# Altium PCB radial_led_watch.PcbDoc
Units mm, origin at the board's own origin, x right, y up, seen from the top; angles counter-clockwise.
Board outline 52 x 45 mm, 4 copper layers (Top Layer, Internal Signal 1, Internal Signal 2, Bottom Layer), stack 0.603 mm thick; 52 components, 32 nets, 168 pads, 286 vias.
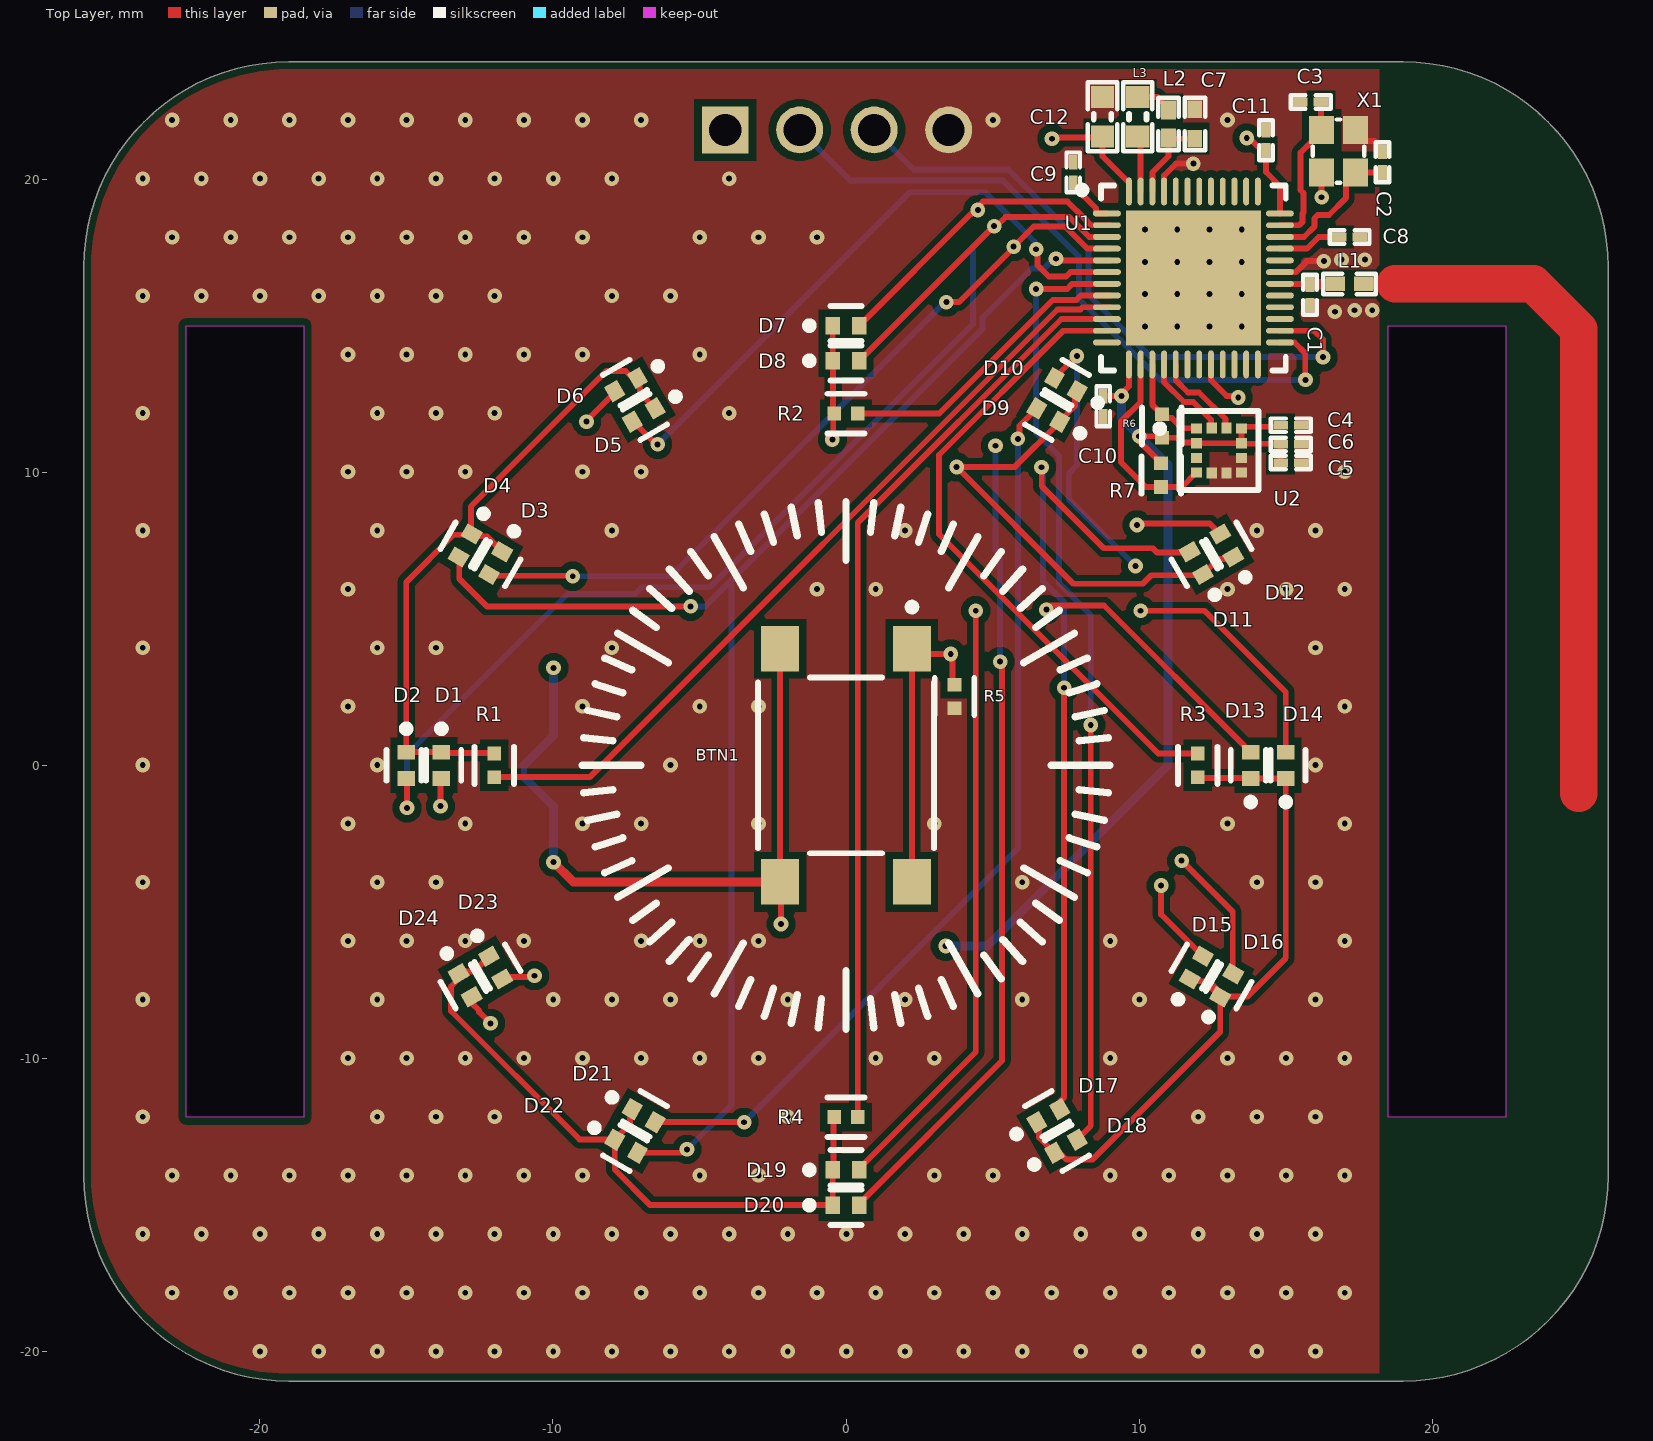
[diagram p0: Top Layer view]
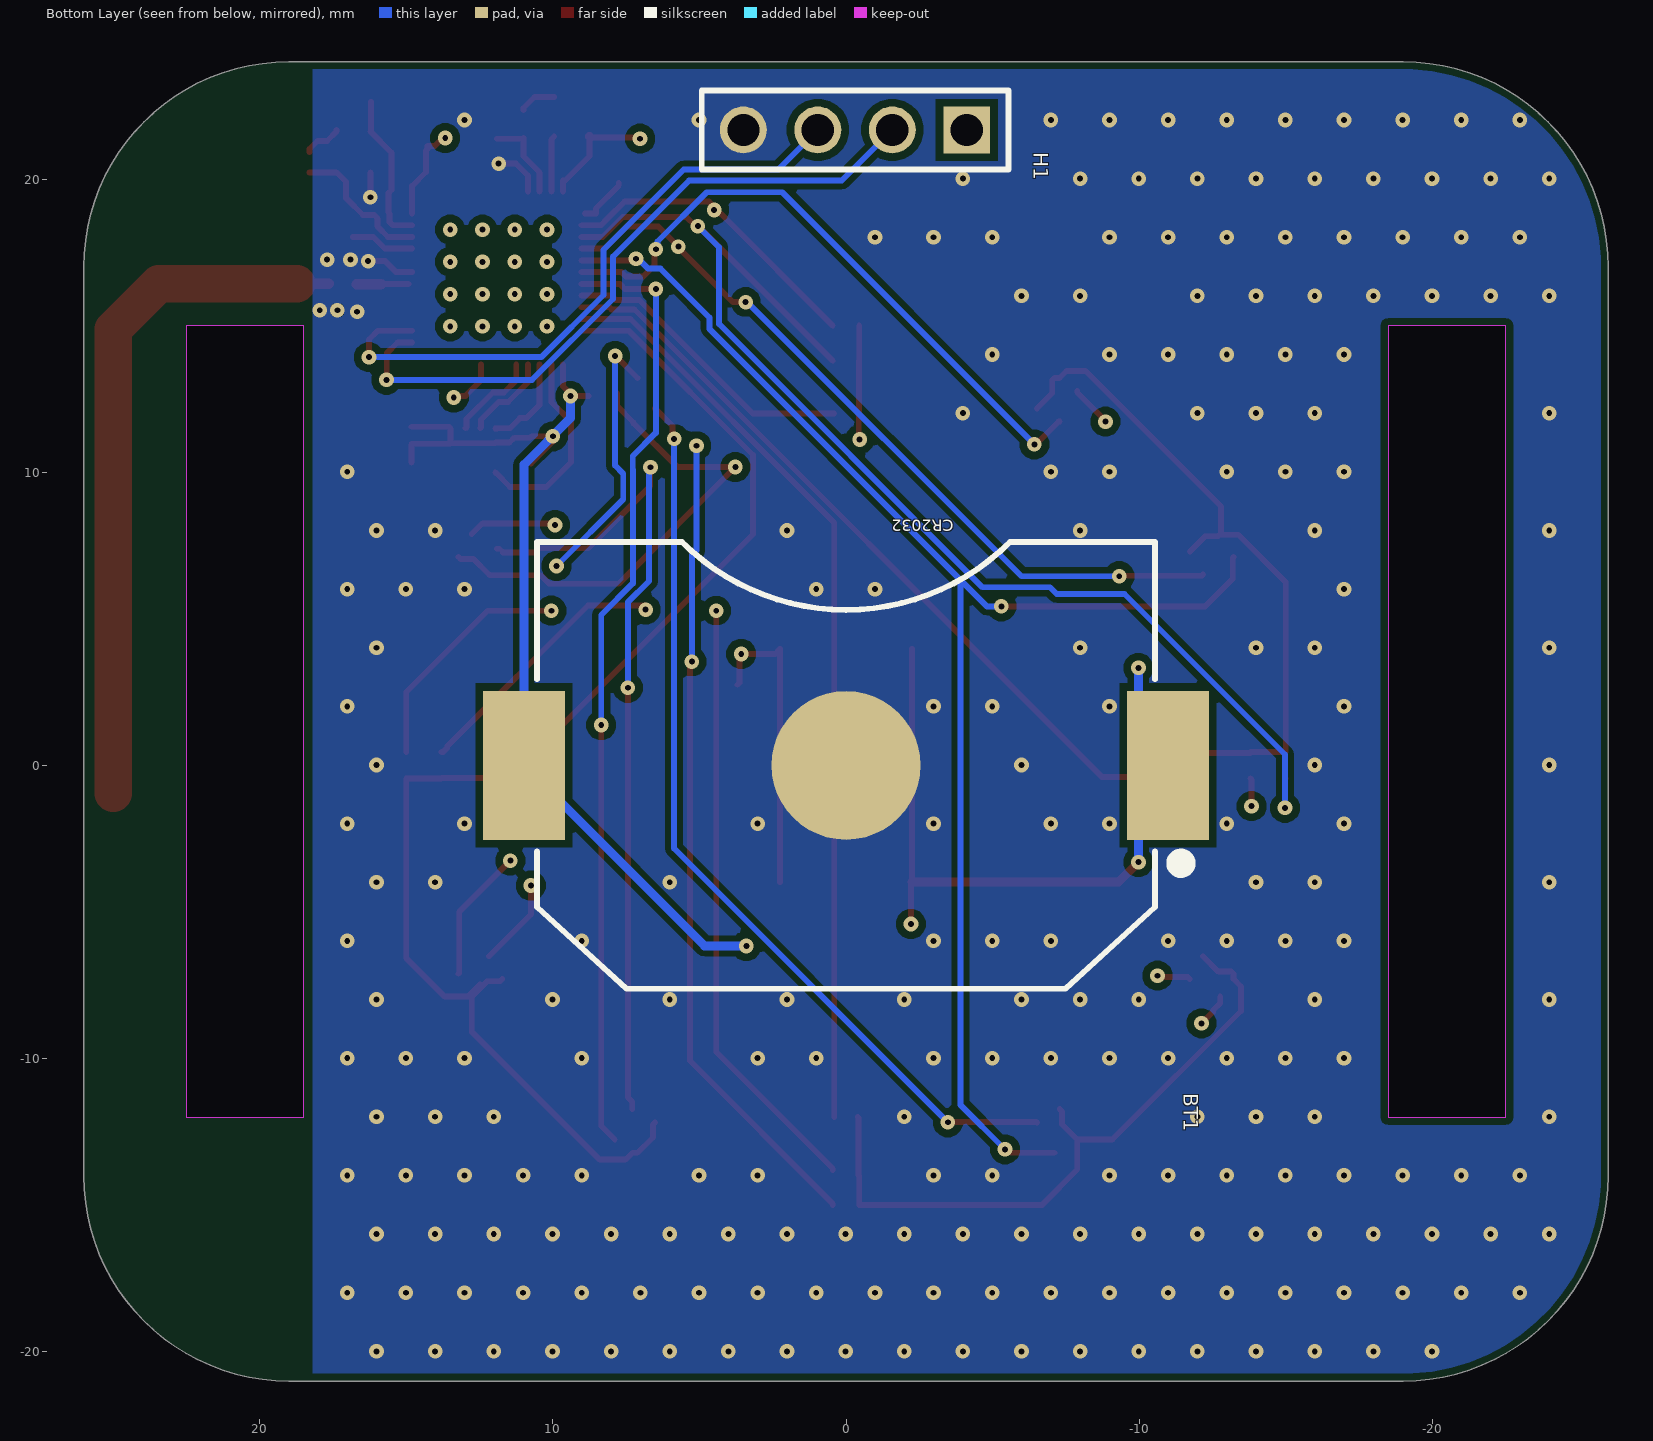
[diagram p1: Bottom Layer view, seen from below]
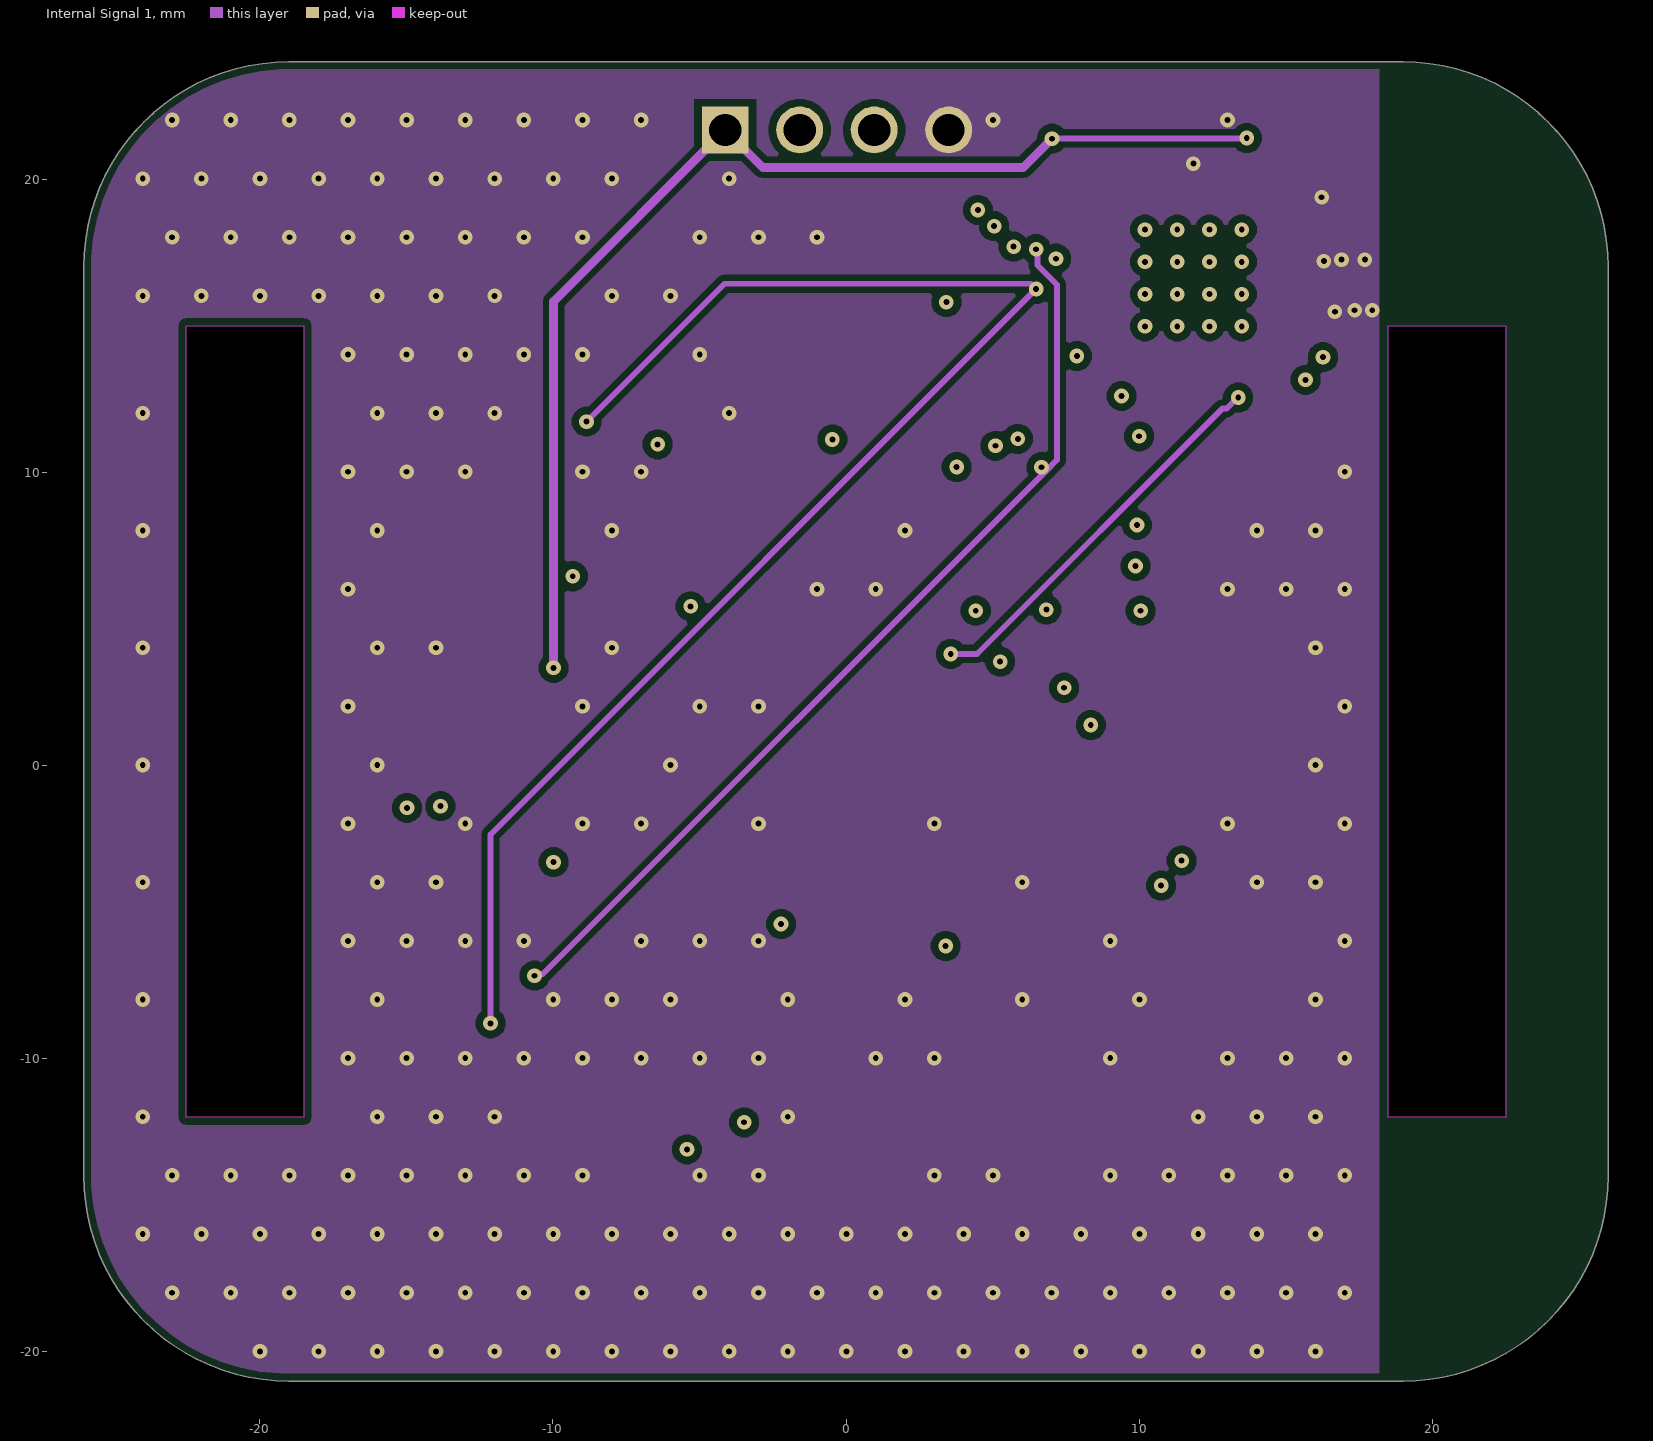
[diagram p2: Internal Signal 1]
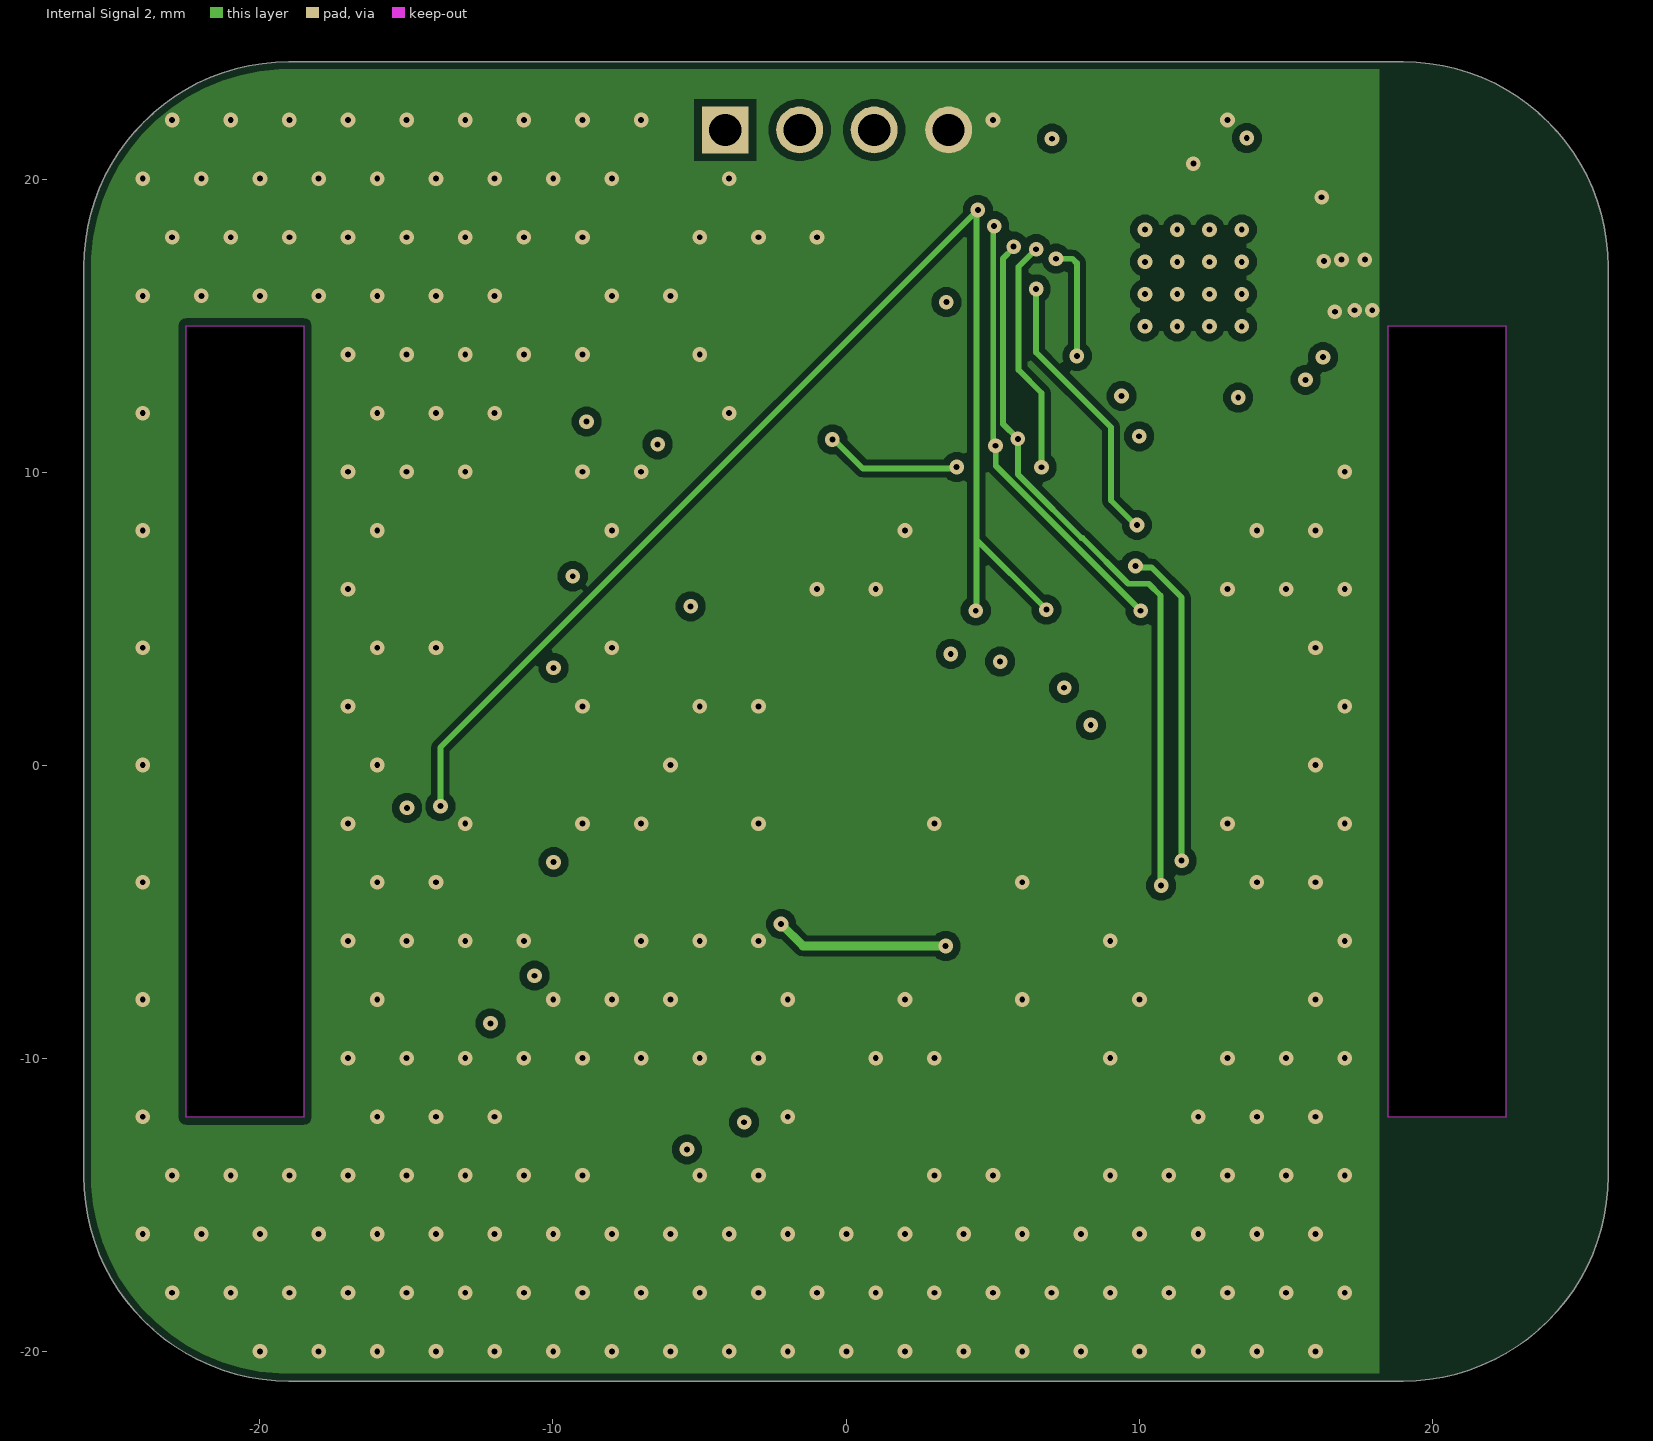
[diagram p3: Internal Signal 2]
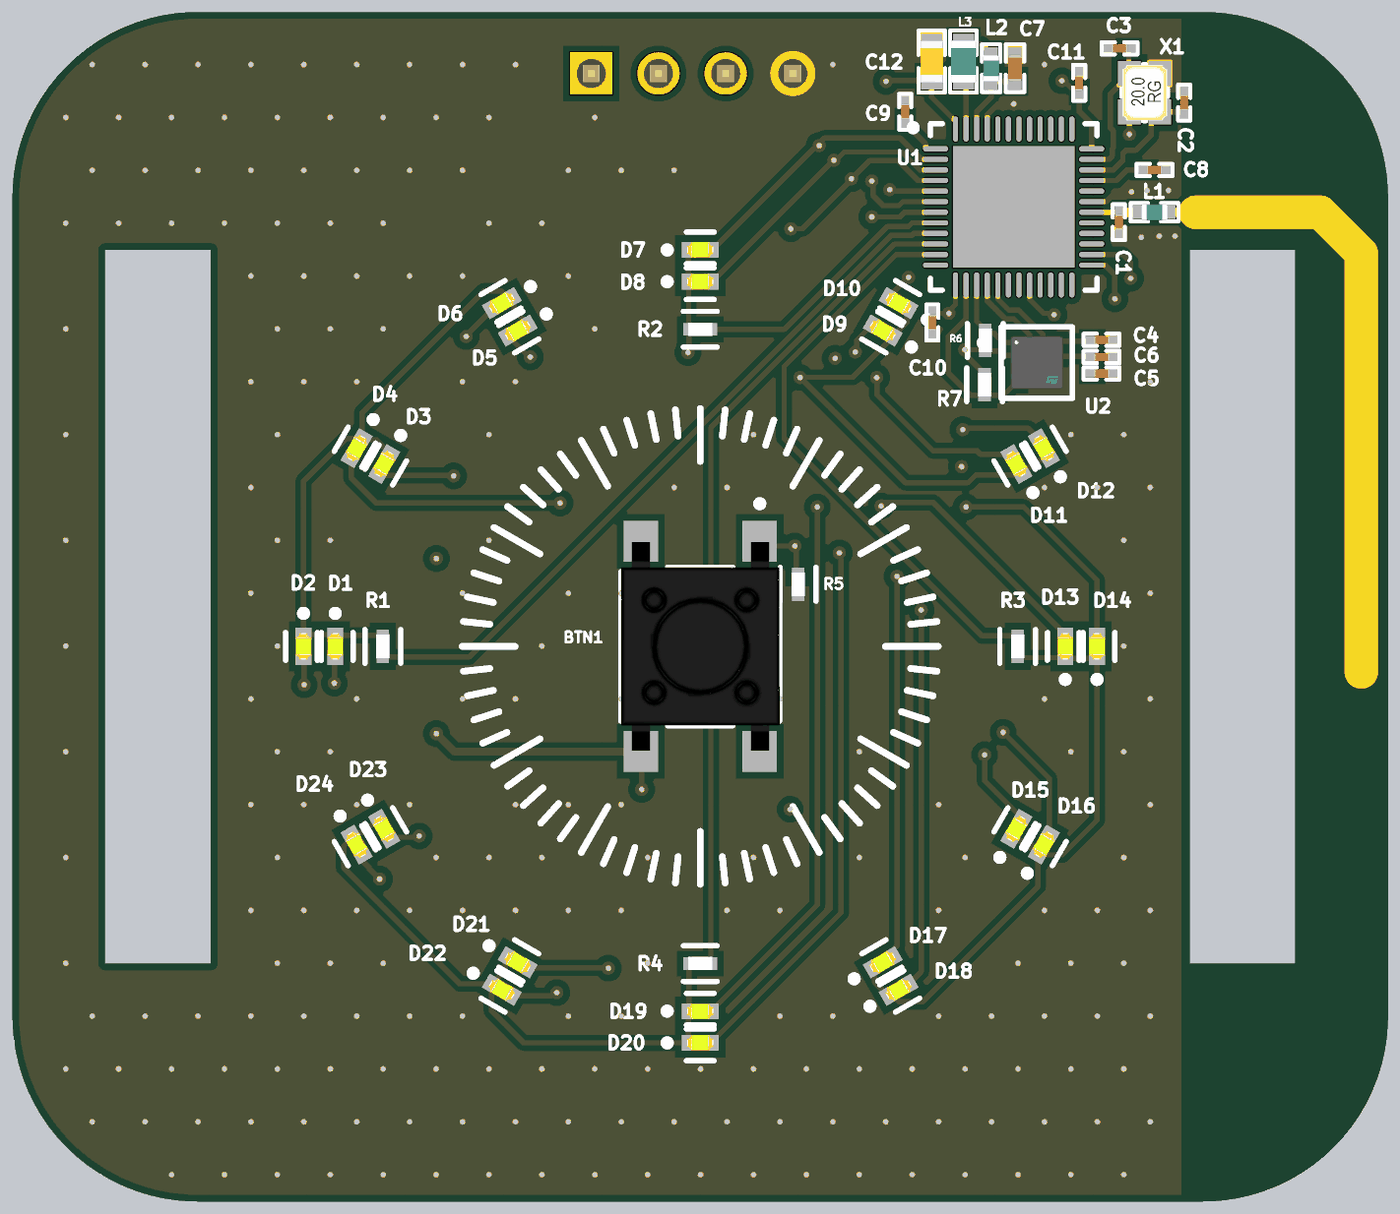
[diagram p4: 3D render of the assembled board from above, using the file's embedded part models]

## Layer stack, top to bottom
Top Solder: solder mask 0.0102, Solder Resist, Dk 3.5
Top Layer: signal copper 0.035
Dielectric 2: prepreg 0.0711, PP-006, Dk 4.1
Internal Signal 1: signal copper 0.0356
Dielectric 1: dielectric 0.32, FR-4, Dk 4.8
Internal Signal 2: signal copper 0.0356
Dielectric 3: prepreg 0.0711, PP-006, Dk 4.1
Bottom Layer: signal copper 0.035
Bottom Solder: solder mask 0.0102, Solder Resist, Dk 3.5

## Board outline
-26,-14 -26,17 cw(c-19,17) -19,24 19,24 cw(c19,17) 26,17 26,-14 cw(c19,-14) 19,-21 -19,-21 cw(c-19,-14)
cut-out: 18.5,15 22.5,15 22.5,-12 18.5,-12
cut-out: -22.5,15 -18.5,15 -18.5,-12 -22.5,-12

## Design rules (kind name [scope] priority, off if disabled: settings)
BoardOutlineClearance [All] p1: gap=0.254 ignorepadtopadclearanceinfootprint=FALSE except(0: Arc-SplitContinuation Track-SplitContinuation SMDPad-SplitContinuation THPad-SplitContinuation Via-SplitContinuation Fill-SplitContinuation Poly-SplitContinuation Region-SplitContinuation Text-SplitContinuation)
Clearance Clearance_1 [All] p1: gap=0.254 ignorepadtopadclearanceinfootprint=FALSE except(0: Arc-Hole Track-Hole SMDPad-Hole THPad-Hole Via-Hole Fill-Hole Poly-Hole Region-Hole Text-Hole; 0.127: Arc-Arc Arc-Track Track-Track SMDPad-SMDPad; 0.2: Arc-SMDPad Arc-Fill Arc-Poly Arc-Region Track-SMDPad Track-Fill Track-Poly Track-Region; 0.33: Arc-THPad Track-THPad; 0.5: THPad-THPad)
DiffPairsRouting [All] p1: maxlimit=0.254 minlimit=0.2 mostfreqgap=0.2 toplayer_minwidth=0.2 toplayer_maxwidth=0.381 toplayer_prefwidth=0.2 midlayer1_minwidth=0.2 midlayer1_maxwidth=0.381 midlayer1_prefwidth=0.2 midlayer2_minwidth=0.2 midlayer2_maxwidth=0.381 midlayer2_prefwidth=0.2 bottomlayer_minwidth=0.2 bottomlayer_maxwidth=0.381 bottomlayer_prefwidth=0.2 maxuncoupledlength=12.7
HoleSize [All] p1: absolutevalues=TRUE maxlimit=2.54 minlimit=0.2 maxpercent=80.000 minpercent=20.000
MatchedLengths [InDifferentialPairClass('X1-Class')] p1: tolerance=0.25 checknetsindiffpair=FALSE checkdiffpairvsdiffpair=TRUE checkxsignals=TRUE checkothers=TRUE
PlaneClearance [All] p1: clearance=0.2
PlaneConnect [All] p1: planeconnectstyle=Direct reliefexpansion=0.508 reliefentries=4 reliefconductorwidth=0.254 reliefairgap=0.254
PolygonConnect [All] p1: connectstyle=Direct reliefconductorwidth=0.254 reliefentries=4 polygonreliefangle="90 Angle" airgapwidth=0.254
RoutingVias [All] p1: holewidth=0.2 width=0.5 viastyle="Through Hole" minholewidth=0.2 minwidth=0.45 maxholewidth=0.711 maxwidth=1.27
SolderMaskExpansion [All] p1: expansion=0.05 istentingtop=FALSE
Width [All] p1: maxlimit=1.27 minlimit=0.127 preferedwidth=0.2 minimp=50.000000 maximp=50.000000 favimp=50.000000
26 further rules are at their usual default settings.

## Classes and differential pairs
differential pair class X1-Class: X1
component class U_LED_multiplexing: D1 D2 D3 D4 D5 D6 D7 D8 D9 D10 D11 D12 D13 D14 D15 D16 D17 D18 D19 D20 D21 D22 D23 D24 R1 R2 R3 R4
differential pair X1: +X1_P -X1_N

## Components (designator, comment, footprint, x,y, rotation, side; value= is the part's Value field where it differs from the comment)
BT1 "BK-912-TR" MPD-CN-DIN-3_V 0,0 r0 bottom locked
BTN1 "PTS645SM43SMTR92LFS" FP-PTS645SM43SMTR92LFS-MFG 0,0 r270 top
C1 "0.8pF" CAPC0603X03L 15.825,16.05 r270 top
C2 "12pF" CAPC0603X03L 18.3,20.575 r90 top
C3 "12pF" CAPC0603X03L 15.85,22.625 r180 top
C4 "100nF" CAPC0603X03L 15.175,11.6 r0 top value=TBD
C5 "10uF" CAPC0603X03L 15.175,10.95 r180 top
C6 "100nF" CAPC0603X03L 15.175,10.325 r180 top
C7 "1.0µF" CAPC1005X04L 11.9,21.875 r270 top
C8 "100pF" CAPC0603X03L 17.175,18.025 r180 top value=TBD
C9 "100nF" CAPC0603X03L 7.75,20.225 r90 top value=TBD
C10 "100nF" CAPC0603X03L 8.775,12.25 r270 top value=TBD
C11 "100nF" CAPC0603X03L 14.325,21.325 r90 top value=TBD
C12 "4.7µF" CAPC1608X06L 8.75,22.125 r270 top
D1 "" FP-SML-P11MTT86-MFG -13.8,0 r270 top
D2 "" FP-SML-P11MTT86-MFG -15,0 r270 top
D3 "" FP-SML-P11MTT86-MFG -11.951,6.9 r240 top
D4 "" FP-SML-P11MTT86-MFG -12.99,7.5 r240 top
D5 "" FP-SML-P11MTT86-MFG -6.9,11.951 r210 top
D6 "" FP-SML-P11MTT86-MFG -7.5,12.99 r210 top
D7 "" FP-SML-P11MTT86-MFG 0,15 r0 top
D8 "" FP-SML-P11MTT86-MFG 0,13.8 r0 top
D9 "" FP-SML-P11MTT86-MFG 6.9,11.951 r150 top
D10 "" FP-SML-P11MTT86-MFG 7.5,12.99 r150 top
D11 "" FP-SML-P11MTT86-MFG 11.951,6.9 r120 top
D12 "" FP-SML-P11MTT86-MFG 12.99,7.5 r120 top
D13 "" FP-SML-P11MTT86-MFG 13.8,0 r90 top
D14 "" FP-SML-P11MTT86-MFG 15,0 r90 top
D15 "" FP-SML-P11MTT86-MFG 11.951,-6.9 r60 top
D16 "" FP-SML-P11MTT86-MFG 12.99,-7.5 r60 top
D17 "" FP-SML-P11MTT86-MFG 6.9,-11.951 r30 top
D18 "" FP-SML-P11MTT86-MFG 7.5,-12.99 r30 top
D19 "" FP-SML-P11MTT86-MFG 0,-13.8 r0 top
D20 "" FP-SML-P11MTT86-MFG 0,-15 r0 top
D21 "" FP-SML-P11MTT86-MFG -6.9,-11.951 r330 top
D22 "" FP-SML-P11MTT86-MFG -7.5,-12.99 r330 top
D23 "" FP-SML-P11MTT86-MFG -11.951,-6.9 r300 top
D24 "" FP-SML-P11MTT86-MFG -12.99,-7.5 r300 top
H1 "61300411121" 61300411121 -0.31,21.675 r0 bottom
L1 "3.3nH" INDC1005X04L 17.175,16.425 r0 top
L2 "15nH" INDC1005X04L 11,21.875 r90 top
L3 "10µH" INDC1608X06L 9.95,22.125 r270 top
R1 "1k" FP-CRCW0402-e3-IPC_C -12,0 r90 top
R2 "1k" FP-CRCW0402-e3-IPC_C 0,12 r180 top
R3 "1k" FP-CRCW0402-e3-IPC_C 12,0 r270 top
R4 "1k" FP-CRCW0402-e3-IPC_C 0,-12 r180 top
R5 "10k" FP-CRCW0402-e3-IPC_C 3.7,2.35 r90 top
R6 "4.7k" FP-CRCW0402-e3-IPC_C 10.775,11.575 r90 top
R7 "4.7k" FP-CRCW0402-e3-IPC_C 10.75,9.9 r270 top
U1 "NRF52832-QFAA-R" NRSC-QF-48_M 11.85,16.625 r0 top
U2 "LIS2DH12TR" FP-LGA-12-8365767-MFG 12.725,10.738 r0 top
X1 "32MHz" BT-XTAL_2016 16.8,20.95 r90 top

## Footprints (in the part's own frame and the unit in brackets; to place one, negate y for a bottom-side part, rotate by r counter-clockwise, add the part's x,y. Pads: shape width x height; smd on the part's side, far side on the other; paste and mask are expansions set on the pad)
61300411121 [mm] "Pin Header, pitch 2.54 mm, THT, Vertical, single row, 4p"
  rect 1.6x1.6 hole 1.1: 1(-3.81,0)
  round 1.6 hole 1.1: 2(-1.27,0) 3(1.27,0) 4(3.81,0)
  silkscreen extent -5.23,-1.35 5.23,1.35, body extent -5.08,-1.27 5.08,1.27, height 8.57
BT-XTAL_2016 [mm]
  rect 0.95x0.85 smd: 1(-0.725,-0.575) 2(0.725,-0.575) 3(0.725,0.575) 4(-0.725,0.575)
  silkscreen extent -1.08,-0.88 1.08,0.88, body extent -1.05,-0.85 1.05,0.85, height 0.56
CAPC0603X03L [mm]
  rect 0.5x0.3 smd: 1(-0.35,0) 2(0.35,0)
  silkscreen extent -0.68,-0.23 0.68,0.23, body extent -0.3,-0.15 0.31,0.15, height 0.3
CAPC1005X04L [mm]
  rect 0.6x0.5 smd: 1(-0.5,0) 2(0.5,0)
  silkscreen extent -0.9,-0.35 0.9,0.35, body extent -0.51,-0.25 0.51,0.25, height 0.5
CAPC1608X06L [mm]
  rect 0.75x0.8 smd: 1(-0.675,0) 2(0.675,0)
  silkscreen extent -1.17,-0.5 1.17,0.5, body extent -0.8,-0.43 0.8,0.43, height 0.8
FP-CRCW0402-e3-IPC_C [mm]
  rect 0.468x0.472 smd paste+0 mask+0: 1(-0.402,0) 2(0.402,0)
  silkscreen extent -0.64,-0.67 0.64,0.67, body extent -0.74,-0.38 0.74,0.38, height 0.25
FP-LGA-12-8365767-MFG [mm]
  rect 0.375x0.35 smd paste-1000 mask+0: 1(-0.763,0.75) 2(-0.763,0.25) 3(-0.763,-0.25) 4(-0.763,-0.75) 7(0.763,-0.75) 8(0.763,-0.25) 9(0.763,0.25) 10(0.763,0.75)
  rect 0.35x0.375 smd paste-1000 mask+0: 5(-0.25,-0.763) 6(0.25,-0.763) 11(0.25,0.763) 12(-0.25,0.763)
  silkscreen extent -2.15,-1.35 1.35,1.35, body extent -1.58,-1.58 1.58,1.58, height 0.25
FP-PTS645SM43SMTR92LFS-MFG [mm]
  rect 1.55x1.3 smd paste+0 mask+0: 1(-3.975,2.25) 2(3.975,2.25) 3(-3.975,-2.25) 4(3.975,-2.25)
  silkscreen extent -5.52,-3 3,3, body extent -4.85,-3.1 4.85,3.1, height 0.25
FP-SML-P11MTT86-MFG [mm]
  rect 0.5x0.6 smd paste+0 mask+0: 1(-0.45,0) 2(0.45,0)
  silkscreen extent -1.37,-0.67 0.53,0.67, body extent -0.5,-0.3 0.5,0.3, height 0.25
INDC1005X04L [mm]
  rect 0.65x0.5 smd: 1(-0.475,0) 2(0.475,0)
  silkscreen extent -0.9,-0.35 0.9,0.35, body extent -0.5,-0.3 0.5,0.3, height 0.5
INDC1608X06L [mm]
  rect 0.75x0.8 smd: 1(-0.675,0) 2(0.675,0)
  silkscreen extent -1.17,-0.5 1.17,0.5, body extent -0.8,-0.48 0.8,0.48, height 0.8
MPD-CN-DIN-3_V [mm] "CN-DIN, 3-Leads, Body 21.08x15.24mm"
  rect 2.79x5.08 smd: 1(-10.985,0) 2(10.985,0)
  round 5.08 smd: 3(0,0)
  silkscreen extent -11.68,-7.62 10.54,7.62, body extent -10.54,-10 10.57,10, height 4.57
NRSC-QF-48_M [mm] "QFN, 48-Leads, Body 6.00x6.00mm, Pitch 0.40mm, Thermal Pad 4.60x4.60mm, IPC Low Density"
  oval 0.95x0.2 smd: 1(-2.95,2.2) 2(-2.95,1.8) 3(-2.95,1.4) 4(-2.95,1) 5(-2.95,0.6) 6(-2.95,0.2) 7(-2.95,-0.2) 8(-2.95,-0.6) 9(-2.95,-1) 10(-2.95,-1.4) 11(-2.95,-1.8) 12(-2.95,-2.2) 25(2.95,-2.2) 26(2.95,-1.8) 27(2.95,-1.4) 28(2.95,-1) 29(2.95,-0.6) 30(2.95,-0.2) 31(2.95,0.2) 32(2.95,0.6) 33(2.95,1) 34(2.95,1.4) 35(2.95,1.8) 36(2.95,2.2)
  oval 0.2x0.95 smd: 13(-2.2,-2.95) 14(-1.8,-2.95) 15(-1.4,-2.95) 16(-1,-2.95) 17(-0.6,-2.95) 18(-0.2,-2.95) 19(0.2,-2.95) 20(0.6,-2.95) 21(1,-2.95) 22(1.4,-2.95) 23(1.8,-2.95) 24(2.2,-2.95) 37(2.2,2.95) 38(1.8,2.95) 39(1.4,2.95) 40(1,2.95) 41(0.6,2.95) 42(0.2,2.95) 43(-0.2,2.95) 44(-0.6,2.95) 45(-1,2.95) 46(-1.4,2.95) 47(-1.8,2.95) 48(-2.2,2.95)
  rect 4.6x4.6 smd: 49(0,0)
  silkscreen extent -3.92,-3.15 3.15,3.15, body extent -3,-3 3,3, height 0.9

## Part data
BT1: library part CMP-0452-00001-3, "Coin Cell Holder, 21.08 x 15.24 mm SMD", Manufacturer="Memory Protection Devices", Battery Series=2032, Battery Type, Function="Coin Cell, Retainer", Category="Battery Products", ComponentLink1Description="Manufacturer URL", ComponentLink1URL=http://www.memoryprotectiondevices.com/, ComponentLink2Description=Datasheet, ComponentLink2URL=http://www.memoryprotectiondevices.com/datasheets/BK-912-datasheet.pdf, ComponentLink3Description="Package Specification", ComponentLink3URL=http://www.memoryprotectiondevices.com/datasheets/BK-912-datasheet.pdf, Family="Battery Holders, Clips, Contacts", Mounting Technology="Surface Mount", Number of Cells=1, PackageDescription="3-Pin, CN-DIN, Body 21.08x15.24mm", PackageReference=CN-DIN-3, PartNumber=BK-912-TR
BTN1: library part CMP-2000-05160-2, "SWITCH TACTILE SPST-NO 0.05A 12V", Case/Package=SMD/SMT, Color=Black, Contact Resistance=100mR, Current Rating=50mA, Max Operating Temperature=60°C, Max Voltage Rating (DC)=12V, Min Operating Temperature=-20°C, Operating Force=160gf, Package Quantity=1, Actuator Length=0.85mm, Actuator Material=Nylon, Actuator Type=Standard, Contact Material=Silver, Contact Plating=Silver, Depth=9mm, Illumination Type=Non-Illuminated, Lead Free="Lead Free", Length=6mm, Max Current Rating=50mA, Mechanical Life=100000Cycles, Mount="Surface Mount", Orientation=Straight, Packaging="Tape and Reel", REACH SVHC="No SVHC", Switch Function=Off-Mom, Termination="Gull Wing", Throw Configuration=SPST, Voltage Rating (DC)=12V
C1 C2 C3 C4 C5 C6 C8 C9 C10 C11: library part CAP_0201, "Capacitor, NP0, ±5%", Part Number=C0201-TBD, Artikkelnr Noca=N.A., Artikkelnr Simpro=N.A., Footprint Doc=0201, LatestRevisionDate=2014-11-13, Note="Chip Cap", Pin Count=2, Published=2014-11-13, Publisher="Nordic Semiconductor"
C7: library part CAP_0402, "Capacitor, X5R, ±5%", Part Number=C0402-1µ0, Artikkelnr Noca=20039235, Artikkelnr Simpro=N.A., Footprint Doc=0402, LatestRevisionDate=2009-11-23, Note=6.3V, Pin Count=2, Published=2009-05-08, Publisher="Nordic Semiconductor"
C12: library part CAP_0603, "Capacitor, X5R, ±10%", Part Number=C0603-4µ7, Artikkelnr Noca=20069060, Artikkelnr Simpro=N.A., Footprint Doc=0603, LatestRevisionDate=2009-11-23, Note=6.3V, Pin Count=2, Published=2009-05-08, Publisher="Nordic Semiconductor"
D1 D2 D3 D4 D5 D6 D7 D8 D9 D10 D11 D12 D13 D14 D15 D16 D17 D18 D19 D20 D21 D22 D23 D24: library part CMP-2000-07126-2, "LED YELLOW/GREEN CLEAR 1006 SMD", Case Code (Imperial)=0402, Case Code (Metric)=1005, Color=Green, Forward Current=20mA, Forward Voltage=1.9V, Lens Color=Colorless, Max Operating Temperature=85°C, Min Operating Temperature=-40°C, Package Quantity=1, Power Rating=54mW, Test Current=1mA, Case/Package=0402, Dominant Wavelength=569nm, Height=0.25mm, Illumination Color=Green, Lead Free="Lead Free", Length=1mm, Lens Style=Diffused, Lens Transparency=Clear, Luminous Intensity=2.1mcd, Mount="Surface Mount", Number of LEDs=1, Number of Pins=2, Packaging="Tape and Reel", Radiation Hardening=No, REACH SVHC="No SVHC", RoHS Compliant=Yes, Series=PicoLED™, Viewing Angle=150°, Wavelength=569nm, Width=0.6mm
H1: library part CMP-1502-01064-1, "THT Vertical Pin Header WR-PHD, Pitch 2.54 mm, Single Row, 4 pins", Contact Resistance=20mOhm, Manufacturer="Wurth Elektronik", Operating Temperature=-40to105degC, Rated Current=3A, Withstanding Voltage=500VAC, Working Voltage=250VAC, Datasheet URL=https://katalog.we-online.de/em/datasheet/6130xx11121.pdf, Gender=Male, Manufacturer URL=http://www.we-online.de, Mounting Technology=THT, Orientation=Vertical, Package Reference=61300411121, Packaging=Bag, Part Number=61300411121, Pin Number=4, Pitch=2.54mm, Publisher=WurthElektronik, Row Number=Single
L1 L2: library part IND_0402, "High frequency chip inductor ±10%", 2nd source part number=658-1328, Manufacturer="Taiyo Yuden", Manufacturer Part Number=HK100515NJ-T, Part Number=L0402-15n, Supplier part number=587-1521-1-ND, 2nd source Supplier=Farnell, Artikkelnr Noca=33029323, Artikkelnr Simpro=N.A., Datasheet=http://www.yuden.co.jp/productdata/catalog/en/mlci04_e.pdf, Footprint Doc=0402, LatestRevisionDate=2012-09-19, Note="High frequency chip inductor ±10%", Pin Count=2, Published=2010-07-12, Publisher="Nordic Semiconductor", Supplier=Digi-Key
L3: library part IND_0603, "Chip inductor, IDC,min = 50 mA, ±20%", 2nd source part number=178-6105, Manufacturer="Taiyo Yuden", Manufacturer Part Number=LBMF1608T100K, Part Number=L0603-10µ, Supplier part number=587-1714-1-ND, 2nd source Supplier=Farnell, Artikkelnr Noca=33029314, Artikkelnr Simpro=N.A., Datasheet=http://www.yuden.co.jp/ut/product/pdf/elb2_e.pdf, Footprint Doc=0603, LatestRevisionDate=2012-09-19, Note="LBMF1608T100K 10µH 80mA 0603", Pin Count=2, Published=2010-02-24, Publisher="Nordic Semiconductor", Supplier=Digi-Key
R1 R2 R3 R4 R5 R6 R7: library part CMP-2002-08122-2, "RES Thick Film, 0Ω, 0.063W, 0402", Case Code (Imperial)=0402, Case Code (Metric)=1005, Max Operating Temperature=155°C, Max Power Dissipation=63mW, Min Operating Temperature=-55°C, Package Quantity=1, Resistance=0mR, Temperature Coefficient=100ppm/°C, Tolerance=5%, Voltage Rating=50V, Case/Package=0402, Composition="Thick Film", Contact Plating=Tin, Depth=0.5mm, Features="Automotive AEC-Q200", Height=0.35mm, Lead Free="Lead Free", Length=1mm, Military Standard=Not, Mount="Surface Mount", Number of Terminations=2, Packaging="Tape and Reel", Power Rating=63mW, Radiation Hardening=No, Termination=SMD/SMT, Voltage Rating (DC)=50V, Weight=2.3E-05oz, Width=0.5mm
U1: library part CMP-2100-03661-1, "Multiprotocol Bluetooth Smart, ANT/ANT+ and Proprietary System-on-Chip, 2.4 GHz, 256 KB FLASH, 1.7 to 3.6 V, -40 to 85 degC, 48-Pin QFN, RoHS, Tape and Reel", Frequency=2.4GHz, Manufacturer="Nordic Semiconductor", Max Operating Temperature=85degC, Min Operating Temperature=-40degC, Package Description="48-Pin Quad Flat No-lead Package, Body 6 x 6 mm, Pitch 0.4 mm, Thermal Pad 4.6 x 4.6 mm", Package Reference=QF-48, Datasheet URL=http://infocenter.nordicsemi.com/pdf/nRF52832_PS_v1.0.pdf, Datasheet Version="Rev. 1.0, 02/2016", Lead Free=LeadFree, Manufacturer URL=http://www.nordicsemi.com/eng/Products/, Max Frequency=2.4GHz, Mount=SurfaceMount, Packaging=TapeandReel, RoHSCompliant=true
U2: library part CMP-2000-05369-2, "ACCEL 2-16G I2C/SPI 12LGA", Case/Package=LGA, Max Operating Temperature=85°C, Max Supply Voltage=3.6V, Min Operating Temperature=-40°C, Min Supply Voltage=1.71V, Axis="X, Y, Z", Bandwidth=672Hz, Contact Plating=Gold, Height=1mm, Interface=I2C, Lead Free="Lead Free", Length=2.15mm, Mount="Surface Mount", Number of Pins=12, Output Type=SPI, Packaging="Cut Tape", Radiation Hardening=No, REACH SVHC="No SVHC", Width=2.15mm
X1: library part XTAL_SMD2016, "XTAL SMD 2016, 32MHz, Cl=8pF, Total Tol: ±40ppm", Manufacturer="Epson Toyocom", Manufacturer Part Number=Q22FA12800025, Part Number=XTAL_SMD2016_32MHz_8pF_Epson, Supplier part number=171-2806, Artikkelnr Noca=N.A., Artikkelnr Simpro=N.A., Datasheet=http://www.epsondevice.com/docs/qd/en/DownloadServlet?id=ID000449, Footprint Doc=XTAL_2016, LatestRevisionDate=2014-11-27, Note="XTAL SMD 32.000MHz", Pin Count=4, Published=2012-03-09, Publisher="Nordic Semiconductor", Supplier=Farnell

## Via types
v1: diameter 0.5, hole 0.2, Top Layer to Bottom Layer, tented both sides, 270 vias
v2: diameter 0.5, hole 0.2, Top Layer to Bottom Layer, 16 vias

## Nets (pads, with @x,y where several pads share a name; then routed paths per layer and width w, separated by ;. In a path a pad name is that pad's centre, name@x,y a point inside that pad or via, vN(x,y) a via of type N, cw(c..) or ccw(c..) an arc to the next point about the centre after c; other vN are vias at no path point)
Antenna:  | length 23.8
  Top Layer w0.2: 18.731,16.425 18.743,16.437
  Top Layer w0.367: 17.65,16.425 18.731,16.425
  Top Layer w1.27: 18.731,16.425 23.444,16.425 24.991,14.878 24.991,-0.964
DEC4: C7.2 L2.1 U1.46 | length 3
  Top Layer w0.2: U1.46 10.45,20.225 11,20.775 L2.1 11.025,21.375 C7.2
GND: BT1.3 C1.2 C2.2 C3.2 C4.2 C5.1 C6.1 C7.1 C8.1 C9.2 C10.2 C11.2 C12.1 H1.4 R5.1 U1.31 U1.45 U2.5 U2.6 U2.7 U2.8 X1.2 X1.4 | length 5.5
  Top Layer w0.2: U1.45 10.85,20.116 11.259,20.525 v1(11.85,20.525) ; U1.31 15.341,16.825 15.716,17.2 v1(16.3,17.2) ; v1(16.225,19.376) X1.4 ; X1.2 17.375,21.625 17.7,21.3 18.025,21.3 18.3,21.025 C2.2
  other v1: -19.987,-19.987 -17.987,-19.987 -15.987,-19.987 -13.987,-19.987 -11.987,-19.987 -9.987,-19.987 -7.987,-19.987 -5.987,-19.987 -3.987,-19.987 -1.987,-19.987 0.013,-19.987 2.013,-19.987 4.013,-19.987 6.013,-19.987 8.013,-19.987 10.013,-19.987 12.013,-19.987 14.013,-19.987 16.013,-19.987 -22.987,-17.987 -20.987,-17.987 -18.987,-17.987 -16.987,-17.987 -14.987,-17.987 -12.987,-17.987 -10.987,-17.987 -8.987,-17.987 -6.987,-17.987 -4.987,-17.987 -2.987,-17.987 -0.987,-17.987 1.013,-17.987 3.013,-17.987 5.013,-17.987 7.013,-17.987 9.013,-17.987 11.013,-17.987 13.013,-17.987 15.013,-17.987 17.013,-17.987 -23.987,-15.987 -21.987,-15.987 -19.987,-15.987 -17.987,-15.987 -15.987,-15.987 -13.987,-15.987 -11.987,-15.987 -9.987,-15.987 -7.987,-15.987 -5.987,-15.987 -3.987,-15.987 -1.987,-15.987 0.013,-15.987 2.013,-15.987 4.013,-15.987 6.013,-15.987 8.013,-15.987 10.013,-15.987 12.013,-15.987 14.013,-15.987 16.013,-15.987 -22.987,-13.987 -20.987,-13.987 -18.987,-13.987 -16.987,-13.987 -14.987,-13.987 -12.987,-13.987 -10.987,-13.987 -8.987,-13.987 -4.987,-13.987 -2.987,-13.987 3.013,-13.987 5.013,-13.987 9.013,-13.987 11.013,-13.987 13.013,-13.987 15.013,-13.987 17.013,-13.987 -23.987,-11.987 -15.987,-11.987 -13.987,-11.987 -11.987,-11.987 -1.987,-11.987 12.013,-11.987 14.013,-11.987 16.013,-11.987 -16.987,-9.987 -14.987,-9.987 -12.987,-9.987 -10.987,-9.987 -8.987,-9.987 -6.987,-9.987 -4.987,-9.987 -2.987,-9.987 1.013,-9.987 3.013,-9.987 9.013,-9.987 13.013,-9.987 15.013,-9.987 17.013,-9.987 -23.987,-7.987 -15.987,-7.987 -9.987,-7.987 -7.987,-7.987 -5.987,-7.987 -1.987,-7.987 2.013,-7.987 6.013,-7.987 10.013,-7.987 16.013,-7.987 -16.987,-5.987 -14.987,-5.987 -12.987,-5.987 -10.987,-5.987 -6.987,-5.987 -4.987,-5.987 -2.987,-5.987 9.013,-5.987 17.013,-5.987 -23.987,-3.987 -15.987,-3.987 -13.987,-3.987 6.013,-3.987 14.013,-3.987 16.013,-3.987 -16.987,-1.987 -12.987,-1.987 -8.987,-1.987 -6.987,-1.987 -2.987,-1.987 3.013,-1.987 13.013,-1.987 17.013,-1.987 -23.987,0.013 -15.987,0.013 -5.987,0.013 16.013,0.013 -16.987,2.013 -8.987,2.013 -4.987,2.013 -2.987,2.013 17.013,2.013 -23.987,4.013 -15.987,4.013 -13.987,4.013 -7.987,4.013 16.013,4.013 -16.987,6.013 -0.987,6.013 1.013,6.013 13.013,6.013 15.013,6.013 17.013,6.013 -23.987,8.013 -15.987,8.013 -7.987,8.013 2.013,8.013 14.013,8.013 16.013,8.013 -16.987,10.013 -14.987,10.013 -12.987,10.013 -8.987,10.013 -6.987,10.013 17.013,10.013 -23.987,12.013 -15.987,12.013 -13.987,12.013 -11.987,12.013 -3.987,12.013 -16.987,14.013 -14.987,14.013 -12.987,14.013 -10.987,14.013 -8.987,14.013 -4.987,14.013 16.675,15.475 17.35,15.525 17.95,15.525 -23.987,16.013 -21.987,16.013 -19.987,16.013 -17.987,16.013 -15.987,16.013 -13.987,16.013 -11.987,16.013 -7.987,16.013 -5.987,16.013 16.9,17.25 17.7,17.25 -22.987,18.013 -20.987,18.013 -18.987,18.013 -16.987,18.013 -14.987,18.013 -12.987,18.013 -10.987,18.013 -8.987,18.013 -4.987,18.013 -2.987,18.013 -0.987,18.013 -23.987,20.013 -21.987,20.013 -19.987,20.013 -17.987,20.013 -15.987,20.013 -13.987,20.013 -11.987,20.013 -9.987,20.013 -7.987,20.013 -3.987,20.013 -22.987,22.013 -20.987,22.013 -18.987,22.013 -16.987,22.013 -14.987,22.013 -12.987,22.013 -10.987,22.013 -8.987,22.013 -6.987,22.013 5.013,22.013 13.013,22.013
"INT 1": U1.16 U2.12 | length 3
  Top Layer w0.2: U1.16 10.85,13.072 11.529,12.393 11.844,12.393 12.45,11.787 12.45,11.525 U2.12
"INT 2": U1.17 U2.11 | length 3.1
  Top Layer w0.2: U1.17 11.25,13.134 11.664,12.72 12.042,12.72 12.95,11.812 12.95,11.525 U2.11
NetD1_1: D1.1 D2.1 D3.1 D4.1 D5.1 D6.1 R1.2 | length 23
  Top Layer w0.2: R1.2 -12.024,0.426 -13.776,0.426 D1.1 D2.1 -15,6.251 -13.386,7.865 -12.79,7.865 D4.1 ; D3.1 -12.251,7.815 -12.69,7.815 D4.1 ; D5.1 -7.035,12.701 -7.035,13.14 D6.1 -7.283,13.215 -7.518,13.45 -8.175,13.45 -12.79,8.835 -12.79,7.915 D4.1
NetD7_1: D7.1 D8.1 D9.1 D10.1 D11.1 D12.1 R2.2 | length 25.5
  Top Layer w0.2: v1(-0.465,11.115) -0.433,11.146 -0.433,11.969 R2.2 -0.438,12.035 -0.438,13.787 D8.1 D7.1 ; D10.1 7.815,12.69 7.815,12.263 7.245,11.694 7.245,11.666 5.761,10.182 3.782,10.182 v1(3.775,10.175) 7.754,6.196 10.125,6.196 10.414,6.485 12.151,6.485 D11.1 12.701,7.035 13.14,7.035 D12.1
  Internal Signal 2 w0.2: v1(-0.465,11.115) -0.415,11.115 0.575,10.125 3.725,10.125 v1(3.775,10.175)
NetL1_1: C1.1 L1.1 U1.30 | length 1.8
  Top Layer w0.2: U1.30@14.925,16.425 C1.1@15.85,16.425 ; C1.1@15.85,16.4 C1.1@15.862,16.412 ; L1.1@16.687,16.412 L1.1
  Top Layer w0.367: C1.1@15.862,16.412 L1.1@16.687,16.412
NetC8_2: C8.2 U1.33 | length 2.2
  Top Layer w0.2: U1.33 15.725,17.625 16.125,18.025 C8.2
NetC9_1: C9.1 U1.1 | length 1.7
  Top Layer w0.2: C9.1 7.75,19.775 8.525,19 8.525,18.825 U1.1
NetD13_1: D13.1 D14.1 D15.1 D16.1 D17.1 D18.1 R3.2 | length 23.9
  Top Layer w0.2: D17.1 6.585,-12.251 6.585,-12.69 D18.1 7.283,-13.215 7.518,-13.45 8.4,-13.45 12.765,-9.085 D16.1 ; D15.1 11.801,-7.365 12.24,-7.365 D16.1 ; R3.2 12.024,-0.426 13.776,-0.426 D13.1 D14.1 15,-6.575 13.685,-7.89 D16.1@12.912,-7.89 ; 12.487,-7.465 D16.1@12.912,-7.89 ; D16.1 D16.1@12.912,-7.89
NetD19_1: D19.1 D20.1 D21.1 D22.1 D23.1 D24.1 R4.2 | length 23.3
  Top Layer w0.2: D23.1 -12.701,-7.035 -13.14,-7.035 D24.1 -13.215,-7.283 -13.475,-7.543 -13.475,-8.376 -9.086,-12.765 D22.1 ; D21.1 -7.365,-11.801 -7.365,-12.24 D22.1 ; R4.2 -0.426,-12.024 -0.426,-13.976 -0.45,-14 D20.1 -6.675,-15 -7.89,-13.785 -7.89,-12.975 D22.1
NetL2_2: L2.2 L3.1 | length 1.3
  Top Layer w0.2: L3.1 10.625,22.8 11,22.425 L2.2
NetL3_2: L3.2 U1.47 | length 1.9
  Top Layer w0.2: L3.2 10.05,21.35 U1.47
P0.17: BTN1.1 BTN1.2 R5.2 U1.20 | length 25.6
  Top Layer w0.2: BTN1.2 BTN1.1 2.425,3.8 v1(3.575,3.8) 3.632,3.743 3.632,2.82 R5.2 ; U1.20 12.45,13.134 12.981,12.603 13.321,12.603 v1(13.378,12.546)
  Internal Signal 1 w0.2: v1(3.575,3.8) 4.469,3.8 12.837,12.168 12.978,12.168 13.356,12.546 v1(13.378,12.546)
SCL: R6.2 U1.15 U2.1 | length 3.2
  Top Layer w0.2: U1.15 10.45,12.3 10.773,11.977 R6.2 10.909,11.843 11.119,11.843 11.463,11.5 11.875,11.5 11.887,11.488 U2.1
SDA: R7.2 U1.14 U2.4 | length 6.7
  Top Layer w0.2: U1.14 10.05,12.396 9.375,11.721 9.375,10.35 10.227,9.498 11.46,9.498 11.95,9.988 U2.4
"SINK 1": R1.1 U1.9 | length 27.7
  Top Layer w0.2: R1.1 -8.74,-0.402 7.215,15.552 8,15.552 8.073,15.625 U1.9@9.025,15.625
"SINK 2": R2.1 U1.8 | length 10.3
  Top Layer w0.2: R2.1 3.18,12 7.059,15.879 7.864,15.879 8.01,16.025 U1.8@9.025,16.025
"SINK 3": R3.1 U1.11 | length 22.2
  Top Layer w0.2: U1.11@9.025,14.825 7.412,14.825 3.171,10.584 3.171,7.883 10.652,0.402 R3.1
"SINK 4": R4.1 U1.10 | length 31.8
  Top Layer w0.2: R4.1 0.402,8.277 7.35,15.225 U1.10@9.025,15.225
"SRC 1": D1.2 D7.2 D13.2 D19.2 U1.2 | length 86.6
  Top Layer w0.2: v1(-13.833,-1.391) -13.833,-0.483 D1.2 ; D19.2 0.45,-13.75 4.425,-9.775 v1(4.425,5.275) ; D7.2 4.258,18.808 4.279,18.808 4.417,18.946 v1(4.498,18.946) ; v1@4.447,18.997 4.679,19.229 7.555,19.229 8.125,18.659 8.359,18.425 U1.2 U1.2@9.025,18.425 ; v1(6.836,5.314) 6.836,5.45 8.8,5.45 13.6,0.65 13.6,0.6 13.75,0.45 D13.2
  Internal Signal 2 w0.2: v1(-13.833,-1.391) -13.833,0.615 v1(4.498,18.946) ; v1(4.425,5.275) 4.447,5.297 4.447,7.703 ; v1@4.447,18.946 4.447,7.703 ; v1(6.836,5.314) 4.447,7.703
"SRC 2": D2.2 D8.2 D14.2 D20.2 U1.3 | length 94.1
  Top Layer w0.2: D2.2 -14.975,-0.475 v1(-14.975,-1.45) ; D20.2 0.45,-14.95 5.323,-10.077 5.323,3.272 5.316,3.28 5.316,3.482 v1(5.258,3.54) ; D8.2 5.043,18.393 v1(5.051,18.393) ; v1@5.047,18.397 5.136,18.397 5.445,18.706 7.616,18.706 8.297,18.025 U1.3@9.025,18.025 ; v1(10.05,5.275) 12.225,5.275 15,2.5 D14.2
  Internal Signal 2 w0.2: v1@5.023,10.9 5.023,18.365 v1(5.051,18.393) ; v1(5.1,10.9) 5.107,10.893 5.107,10.219 v1(10.05,5.275)
  Bottom Layer w0.2: v1(-14.975,-1.45) -14.975,0.369 -9.498,5.846 -7.188,5.846 -6.959,6.075 -4.65,6.075 4.334,15.059 4.334,17.676 v1(5.051,18.393) ; v1(5.1,10.9) 5.1,7.323 5.249,7.174 5.249,3.549 v1(5.258,3.54)
"SRC 3": D3.2 D9.2 D15.2 D21.2 U1.4 | length 85.6
  Top Layer w0.2: D3.2 -12.133,6.468 -9.339,6.468 v1(-9.321,6.45) ; D21.2 -6.497,-12.163 -3.487,-12.163 v1(-3.475,-12.175) ; v1(3.425,15.8) 3.857,15.8 5.716,17.659 v1(5.716,17.693) ; v1@5.751,17.694 5.751,17.727 6.402,18.379 7.48,18.379 8.234,17.625 U1.4@9.025,17.625 ; v1(5.862,11.138) 5.92,11.195 5.92,11.585 D9.2 ; v1(10.75,-4.1) 10.75,-5.084 D15.2
  Internal Signal 2 w0.2: v1(5.716,17.693) 5.716,17.648 5.35,17.282 5.35,11.65 5.871,11.129 5.871,9.917 6.131,9.657 8.031,7.757 8.064,7.757 9.625,6.196 10.329,6.196 10.729,5.796 10.729,-4.079 v1(10.75,-4.1)
  Bottom Layer w0.2: v1(-9.321,6.45) -5.983,6.45 3.367,15.8 v1(3.425,15.8) ; v1(-3.475,-12.175) 5.862,-2.838 v1(5.862,11.138)
"SRC 4": D4.2 D10.2 D16.2 D22.2 U1.5 | length 79.1
  Top Layer w0.2: D4.2 -13.19,7.085 -13.19,6.365 -12.25,5.425 v1(-5.3,5.425) ; D22.2 -5.621,-13.215 -5.506,-13.1 v1(-5.425,-13.1) ; D10.2 7.858,13.963 v1(7.875,13.963) ; v1(7.164,17.281) 7.221,17.225 U1.5@9.025,17.225 ; v1(11.45,-3.25) 13.19,-4.99 13.19,-7.085 D16.2
  Internal Signal 2 w0.2: v1(7.164,17.281) 7.724,17.281 7.875,17.13 v1(7.875,13.963) ; v1(9.875,6.8) 9.925,6.75 10.425,6.75 11.45,5.725 v1(11.45,-3.25)
  Bottom Layer w0.2: v1(-5.425,-13.1) -3.9,-11.575 -3.9,6.329 ; v1(-5.3,5.425) -4.804,5.425 -3.9,6.329 ; v1(7.164,17.281) 7.083,17.281 6.744,16.942 6.325,16.942 4.661,15.279 4.661,14.891 -3.9,6.329 ; v1(7.875,13.963) 7.875,10.229 7.596,9.95 7.596,9.079 v1(9.875,6.8)
"SRC 5": D5.2 D11.2 D17.2 D23.2 U1.6 | length 92.8
  Top Layer w0.2: D23.2 -11.656,-7.22 -10.67,-7.22 v1(-10.625,-7.175) ; D5.2 -7.255,11.726 -6.479,10.95 v1(-6.425,10.95) ; v1(6.484,17.607) 6.535,17.556 6.535,17.057 6.914,16.677 7.508,16.677 7.656,16.825 U1.6@9.025,16.825 ; v1(6.671,10.17) 6.675,10.166 6.675,9.525 8.796,7.404 10.463,7.404 10.603,7.265 11.701,7.265 D11.2 ; D17.2 7.29,-11.475 7.44,-11.324 v1(7.44,2.648) ; D11.2@11.834,7.39 D11.2@11.9,7.39
  Internal Signal 1 w0.2: v1(-10.625,-7.175) -10.568,-7.118 -10.343,-7.118 v1@6.829,10.054 ; v1(6.484,17.607) 6.535,17.556 6.535,17.057 7.197,16.395 7.197,10.422 v1@6.829,10.054 ; v1(6.671,10.17) 6.712,10.17 v1@6.829,10.054
  Internal Signal 2 w0.2: v1(6.484,17.607) 5.883,17.006 5.883,13.492 6.671,12.704 v1(6.671,10.17)
  Bottom Layer w0.2: v1(-6.425,10.95) 2.175,19.55 4.748,19.55 6.427,17.872 6.427,17.664 v1(6.484,17.607) ; v1(6.671,10.17) 6.719,10.122 6.719,6.285 7.44,5.564 v1(7.44,2.648)
"SRC 6": D6.2 D12.2 D18.2 D24.2 U1.7 | length 98
  Top Layer w0.2: D24.2 -12.765,-8.113 -12.514,-8.364 -12.514,-8.411 v1(-12.125,-8.8) ; v1(-8.85,11.725) -8.85,11.756 -7.89,12.716 D6.2 ; v1(6.487,16.25) 7.544,16.25 7.718,16.425 U1.7@9.025,16.425 ; D18.2 8.35,-12.305 v1(8.35,1.375) ; v1(9.925,8.2) 9.975,8.25 12.405,8.25 D12.2
  Internal Signal 1 w0.2: v1(-12.125,-8.8) -12.127,-8.798 -12.127,-2.364 6.575,16.338 6.518,16.396 6.341,16.396 6.308,16.429 -4.146,16.429 v1(-8.85,11.725)
  Internal Signal 2 w0.2: v1(6.487,16.25) 6.487,14.084 9.039,11.532 9.039,9.036 9.875,8.2 v1(9.925,8.2)
  Bottom Layer w0.2: v1(6.487,16.25) 6.487,11.342 7.275,10.554 7.275,10.092 7.269,10.086 7.269,6.208 8.35,5.127 v1(8.35,1.375)
SWDCLK: H1.2 U1.25 | length 23.6
  Top Layer w0.2: U1.25 15.3,14.425 15.667,14.058 15.667,13.158 v1(15.675,13.15)
  Bottom Layer w0.2: H1.2 0.145,19.95 5.35,19.95 7.947,17.353 7.947,15.911 10.708,13.15 v1(15.675,13.15)
SWDIO: H1.3 U1.26 | length 21.6
  Top Layer w0.2: U1.26 15.975,14.825 16.271,14.529 v1(16.271,13.925)
  Bottom Layer w0.2: H1.3 2.31,20.325 5.534,20.325 8.274,17.585 8.274,16.047 10.396,13.925 v1(16.271,13.925)
V_BAT: BT1.1 BT1.2 BTN1.3 BTN1.4 C4.1 C5.2 C6.2 C10.1 C11.1 C12.2 H1.1 R6.1 R7.1 U1.13 U1.36 U1.48 U2.2 U2.9 U2.10 | length 111.4
  Top Layer w0.2: BTN1.3 BTN1.4 -2.215,-4.01 v1(-2.215,-5.412) ; v1@7.063,21.412 C12.2@8.712,21.412 ; C12.2 8.75,20.775 9.575,19.95 9.65,19.95 U1.48 ; C10.1 v1(9.4,12.6) 9.4,12.681 9.65,12.931 U1.13 ; R7.1 10,11.052 v1(10,11.225) 10.723,11.225 R6.1 11.313,11.173 11.475,11.011 11.939,11.011 U2.2 U2.9 ; v1(13.672,21.399) 13.753,21.399 14.026,21.125 14.275,21.125 14.275,21.025 C11.1 14.325,20.241 14.8,19.766 U1.36 ; C6.2 C5.2 14.806,10.969 13.506,10.969 U2.9 ; C4.1@14.825,11.55 13.55,11.55 U2.10 U2.9
  Top Layer w0.3: v1(-9.975,-3.3) -9.3,-3.975 BTN1.4 ; v1(7.025,21.375) v1@7.063,21.412 ; C12.2@8.712,21.412 C12.2
  Internal Signal 1 w0.2: v1(7.025,21.375) 7.037,21.387 13.66,21.387 v1(13.672,21.399)
  Internal Signal 1 w0.3: v1(-9.975,3.325) -9.975,15.82 H1.1 -2.84,20.395 6.045,20.395 v1(7.025,21.375)
  Internal Signal 2 w0.3: v1(-2.215,-5.412) -1.464,-6.162 v1(3.399,-6.162)
  Bottom Layer w0.2: BT1.1@-10.985,-0.395 BT1.1
  Bottom Layer w0.3: BT1.1@-10.985,-0.395 -9.975,-1.405 v1(-9.975,-3.3) ; BT1.1 -9.975,1.01 v1(-9.975,3.325) ; v1(3.399,-6.162) 4.823,-6.162 BT1.2 10.985,10.26 9.4,11.845 v1(9.4,12.6)
X1_N: C3.1 U1.35 X1.3 | length 5.3
  Top Layer w0.2: U1.35 15.458,18.425 15.575,18.542 15.575,18.821 15.609,18.855 15.609,19.517 15.5,19.626 15.5,20.9 16.225,21.625 16.2,21.65 C3.1
X1_P: C2.1 U1.34 X1.1 | length 4.9
  Top Layer w0.2: U1.34 15.624,18.025 15.975,18.376 15.975,18.655 16.092,18.772 16.475,18.772 17.05,19.347 17.05,19.9 X1.1 C2.1
pads on no net: L1.2 U1.12 U1.18 U1.19 U1.21 U1.22 U1.23 U1.24 U1.27 U1.28 U1.29 U1.32 U1.37 U1.38 U1.39 U1.40 U1.41 U1.42 U1.43 U1.44 U1.49 U2.3
copper on no net:
  other v2: 10.2,14.975 11.3,14.975 12.4,14.975 13.5,14.975 10.2,16.075 11.3,16.075 12.4,16.075 13.5,16.075 10.2,17.175 11.3,17.175 12.4,17.175 13.5,17.175 10.2,18.275 11.3,18.275 12.4,18.275 13.5,18.275

## Polygon pours and split planes (outlines as drawn)
GND on Internal Signal 1 "GND_L02_P009" (solid, pour order 9): -26,24 18.19,24 18.19,-21 -26,-21
GND on Internal Signal 2 "GND_L03_P010" (solid, pour order 10): -26,24 18.19,24 18.19,-21 -26,-21
GND on Bottom Layer "GND_L04_P011" (solid, pour order 11): -26,24 18.19,24 18.19,-21 -26,-21
GND on Top Layer "tga" (solid, pour order 7): -26,24 18.19,24 18.19,-21 -26,-21

## Silkscreen, mask and mechanical layers (free items; w line width, h text height)
Top Overlay:
  lines w0.254: -8.951,-0.941 -7.956,-0.836 ; -8.951,0.941 -7.956,0.836 ; -8.803,-1.871 -7.825,-1.663 ; -8.803,1.871 -7.825,1.663 ; -8.56,-2.781 -7.608,-2.472 ; -8.56,2.781 -7.608,2.472 ; -8.222,-3.661 -7.308,-3.254 ; -8.222,3.661 -7.308,3.254 ; -8,0 -9,0 -7,0 ; -7.281,-5.29 -6.472,-4.702 ; -7.281,5.29 -6.472,4.702 ; -6.928,-4 -7.794,-4.5 -6.062,-3.5 ; -6.928,4 -7.794,4.5 -6.062,3.5 ; -6.688,-6.022 -5.945,-5.353 ; -6.688,6.022 -5.945,5.353 ; -6.022,-6.688 -5.353,-5.945 ; -6.022,6.688 -5.353,5.945 ; -5.29,-7.281 -4.702,-6.472 ; -5.29,7.281 -4.702,6.472 ; -4,-6.928 -4.5,-7.794 -3.5,-6.062 ; -4,6.928 -4.5,7.794 -3.5,6.062 ; -3.661,-8.222 -3.254,-7.308 ; -3.661,8.222 -3.254,7.308 ; -2.781,-8.56 -2.472,-7.608 ; -2.781,8.56 -2.472,7.608 ; -1.871,-8.803 -1.663,-7.825 ; -1.871,8.803 -1.663,7.825 ; -0.941,-8.951 -0.836,-7.956 ; -0.941,8.951 -0.836,7.956 ; 0,-8 0,-9 0,-7 ; 0.836,-7.956 0.941,-8.951 ; 0.836,7.956 0.941,8.951 ; 1.663,-7.825 1.871,-8.803 ; 1.663,7.825 1.871,8.803 ; 2.472,-7.608 2.781,-8.56 ; 2.472,7.608 2.781,8.56 ; 3.254,-7.308 3.661,-8.222 ; 3.254,7.308 3.661,8.222 ; 3.5,-6.062 4.5,-7.794 4,-6.928 ; 3.5,6.062 4.5,7.794 4,6.928 ; 4.702,-6.472 5.29,-7.281 ; 4.702,6.472 5.29,7.281 ; 5.353,-5.945 6.022,-6.688 ; 5.353,5.945 6.022,6.688 ; 5.945,-5.353 6.688,-6.022 ; 5.945,5.353 6.688,6.022 ; 6.062,-3.5 7.794,-4.5 6.928,-4 ; 6.062,3.5 7.794,4.5 6.928,4 ; 6.472,-4.702 7.281,-5.29 ; 6.472,4.702 7.281,5.29 ; 7,0 9,0 8,0 ; 7.308,-3.254 8.222,-3.661 ; 7.308,3.254 8.222,3.661 ; 7.608,-2.472 8.56,-2.781 ; 7.608,2.472 8.56,2.781 ; 7.825,-1.663 8.803,-1.871 ; 7.825,1.663 8.803,1.871 ; 7.956,-0.836 8.951,-0.941 ; 7.956,0.836 8.951,0.941 ; 0,9 0,7 0,9 ; 0,9 0,8 0,9
Top Solder:
  lines w0.2: 14.925,16.425 15.85,16.425
  lines w0.367: 15.862,16.412 16.687,16.412 ; 17.65,16.425 18.731,16.425
  lines w1.27: 18.731,16.425 23.444,16.425 24.991,14.878 24.991,-0.964
Mechanical 1:
  the board outline again, w0.254

## Text inside footprints (layer, text, board x,y; h text height)
BT1: Bottom Overlay "CR2032" at -3.683,8.382 h0.4 r180